# Altium PCB PCB1.PcbDoc
Units mm, origin at the board's own origin, x right, y up, seen from the top; angles counter-clockwise.
Board outline 117.02 x 67.61 mm, 4 copper layers (Top Layer, Mid1- GND, Mid2- POWER, Bottom Layer), stack 1.233 mm thick; 108 components, 43 nets, 256 pads, 256 vias.
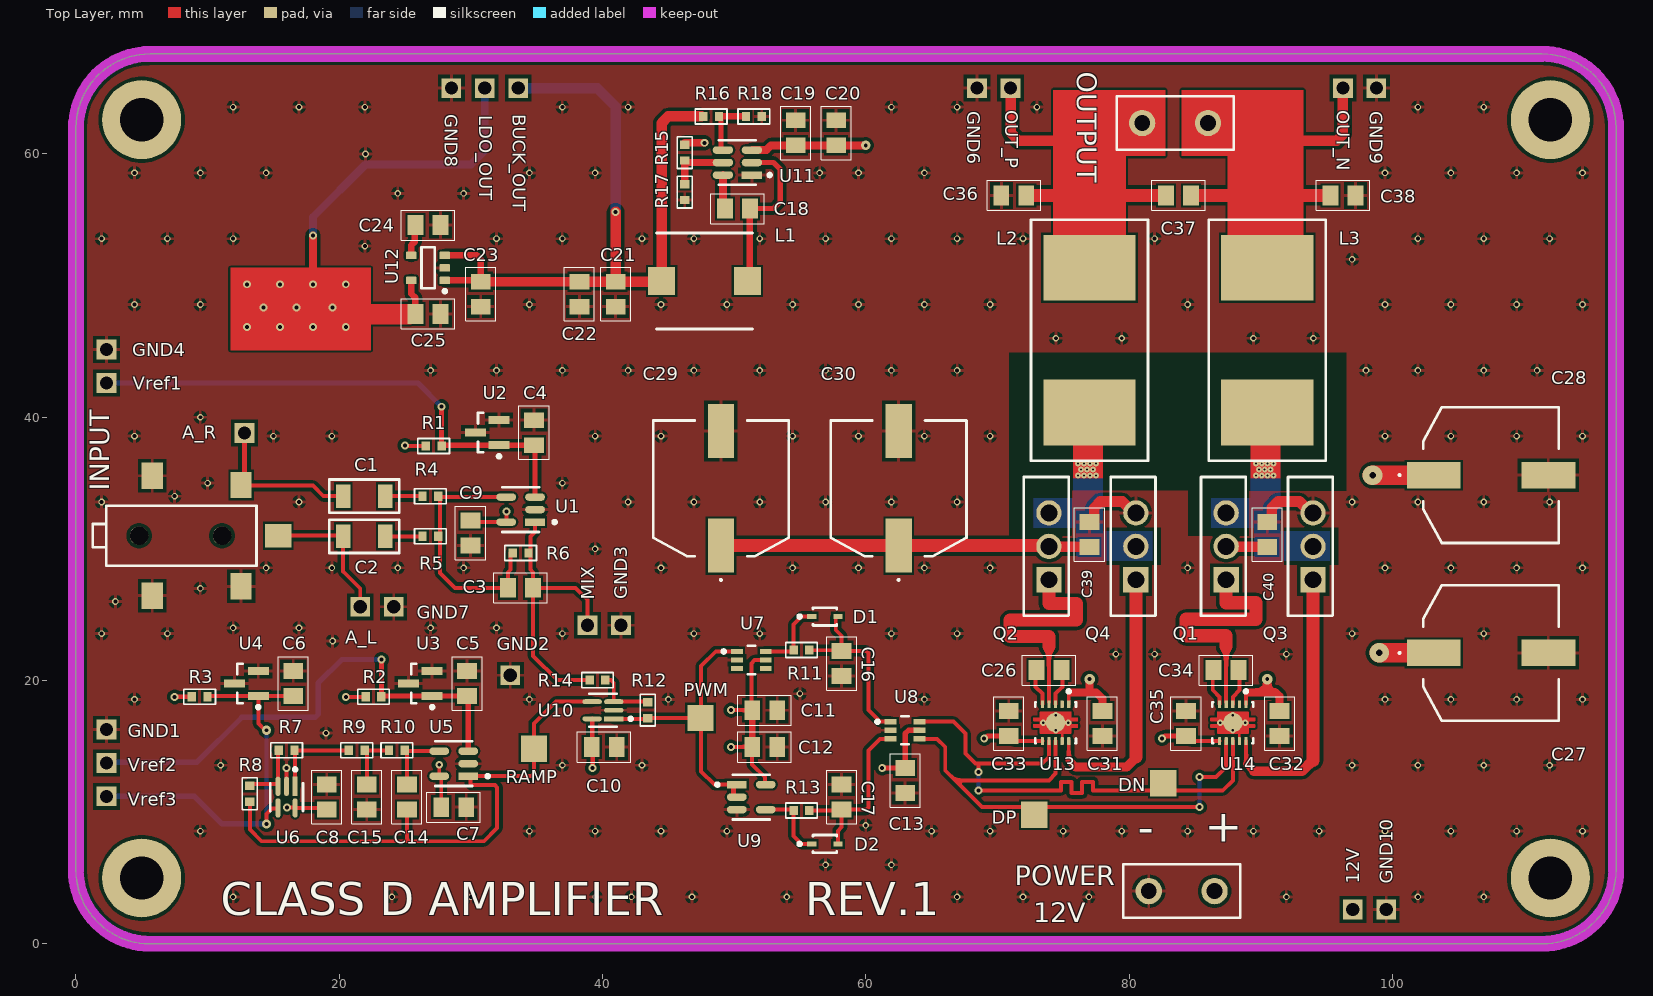
[diagram p0: Top Layer view]
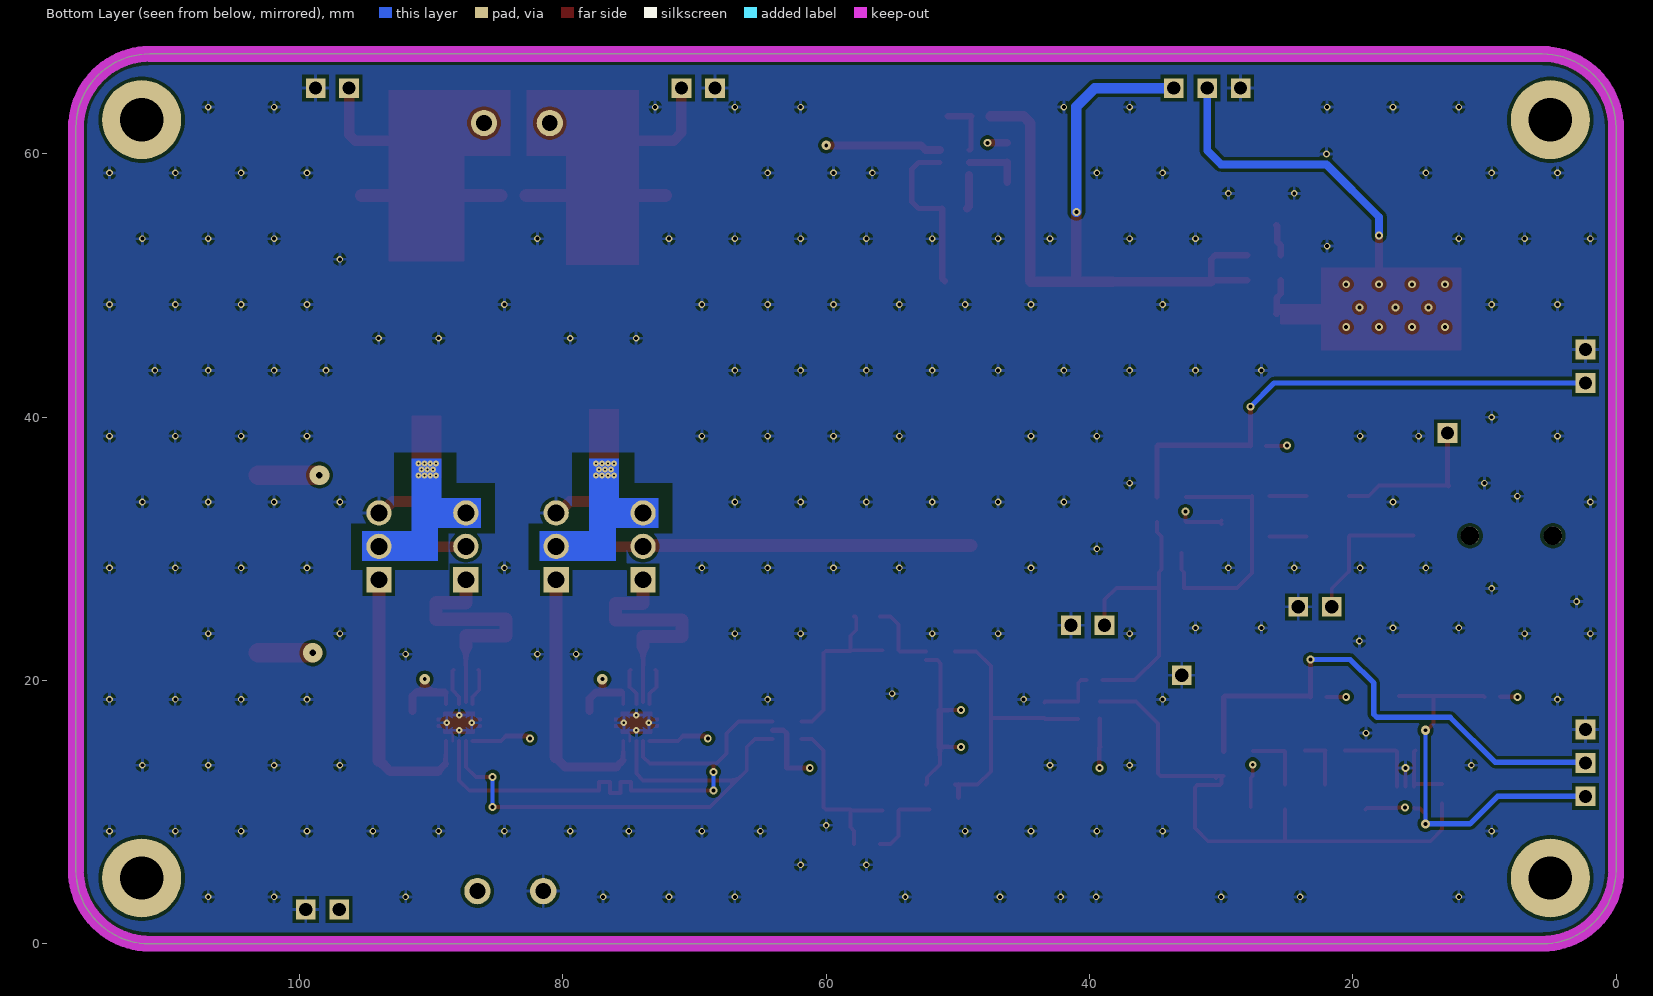
[diagram p1: Bottom Layer view, seen from below]
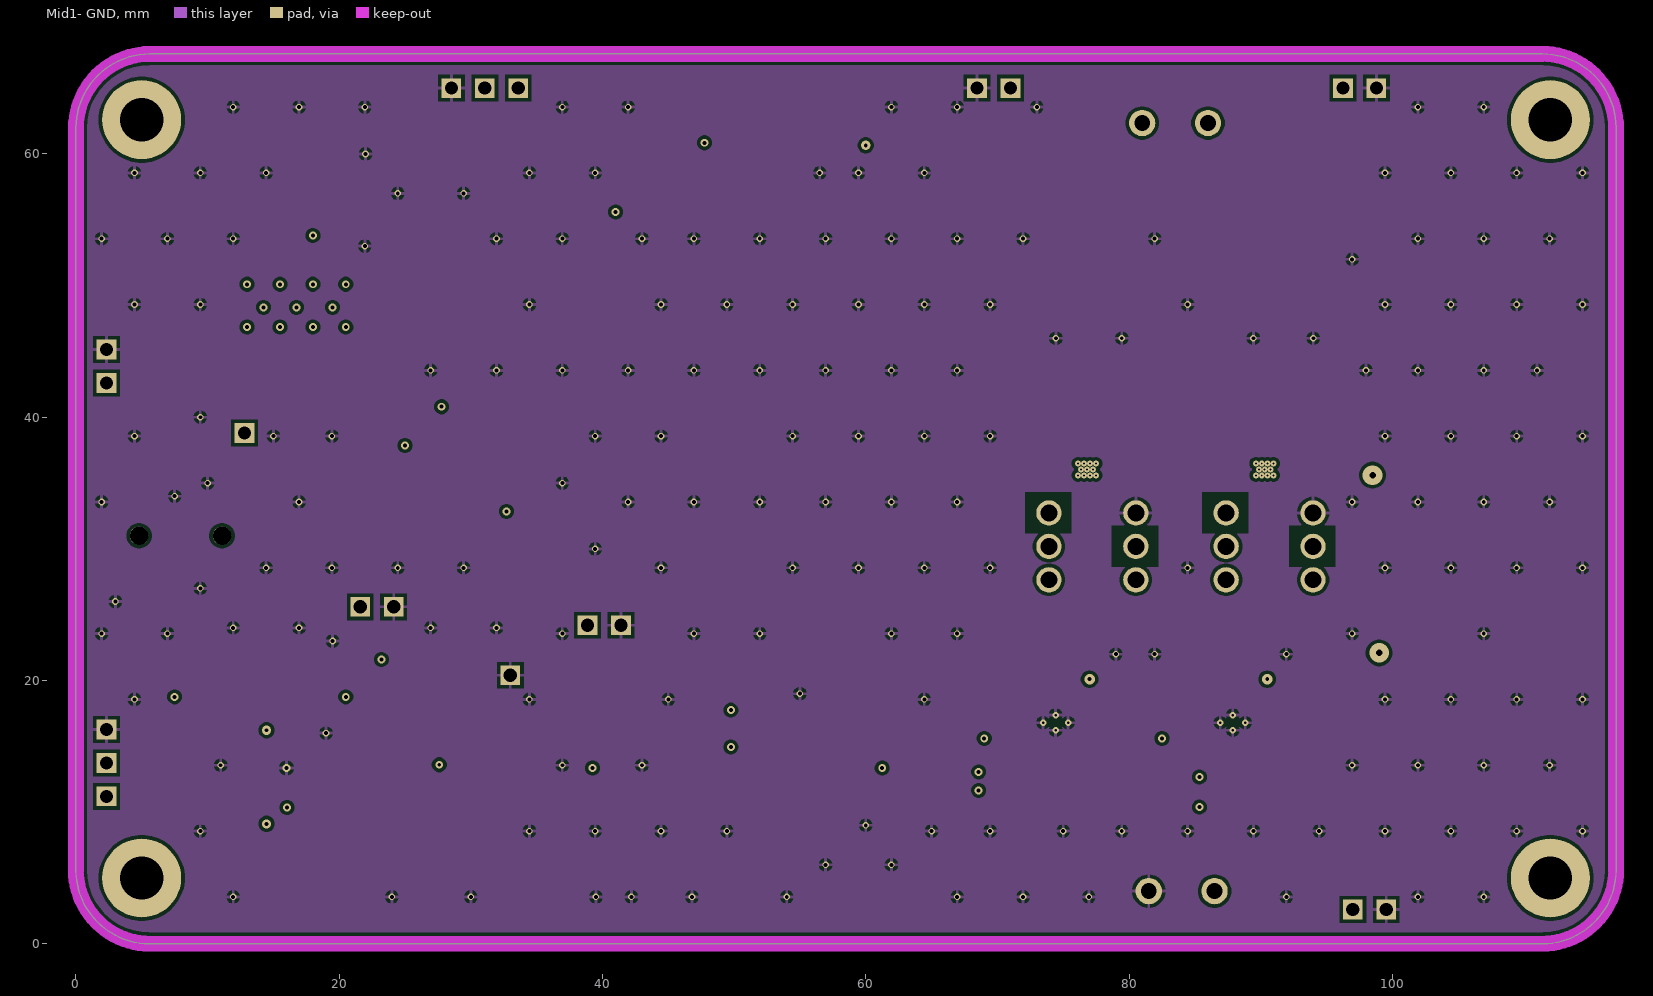
[diagram p2: Mid1- GND]
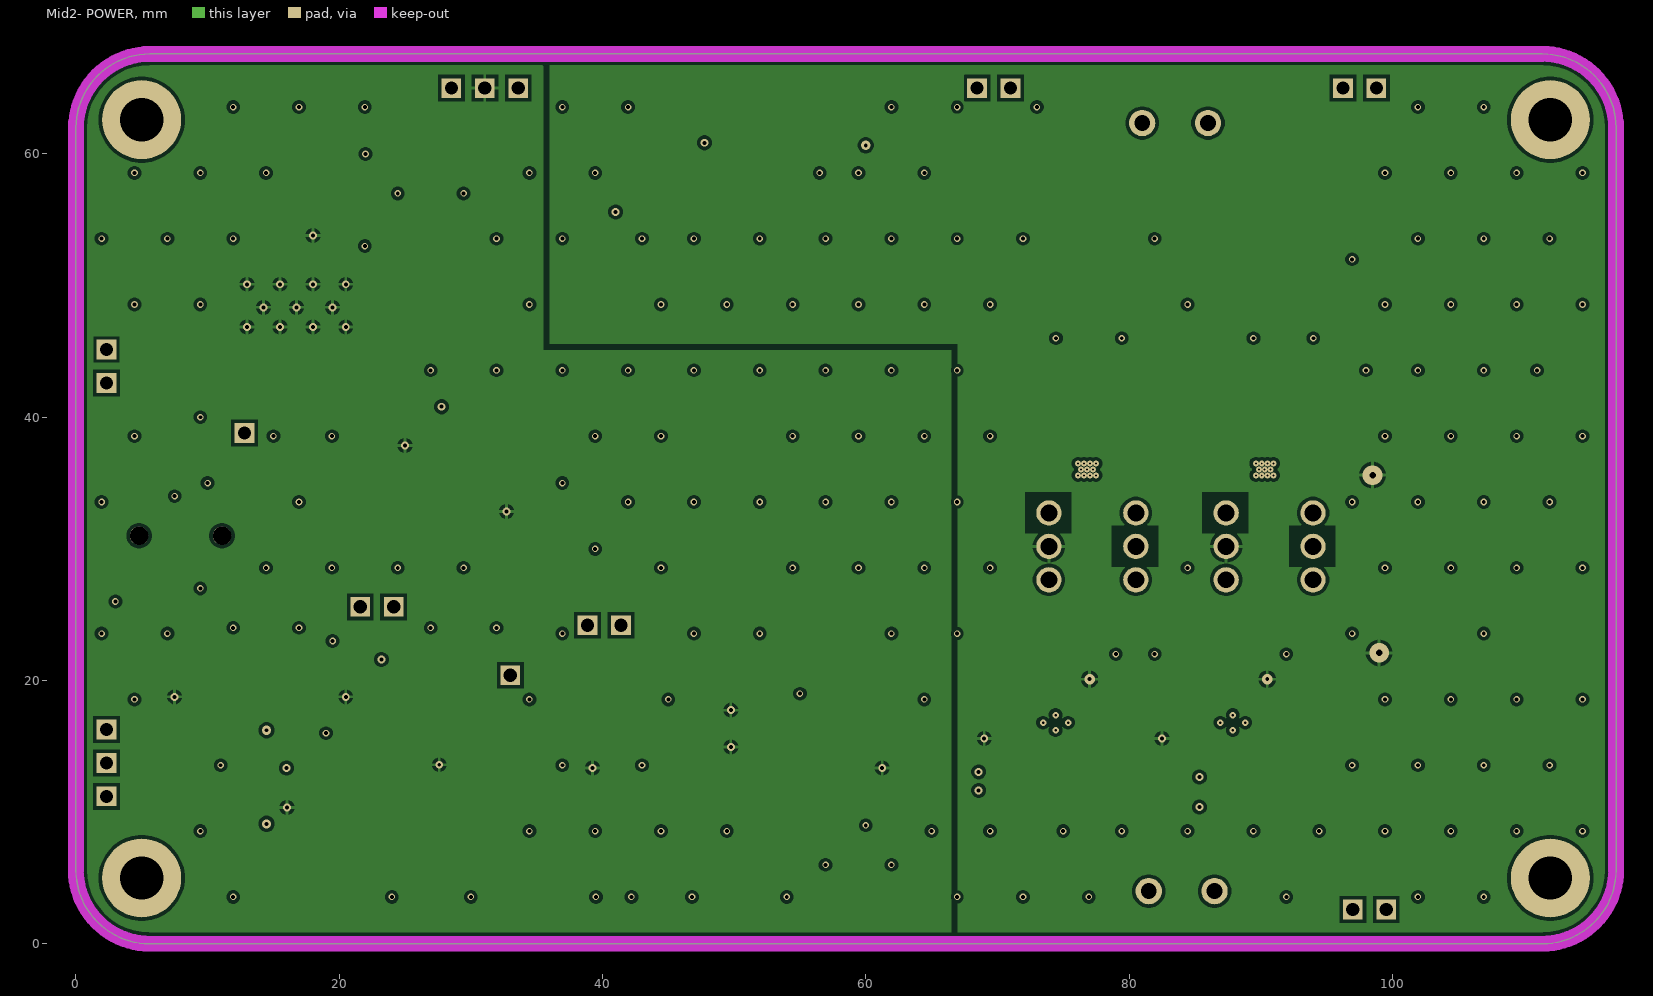
[diagram p3: Mid2- POWER]
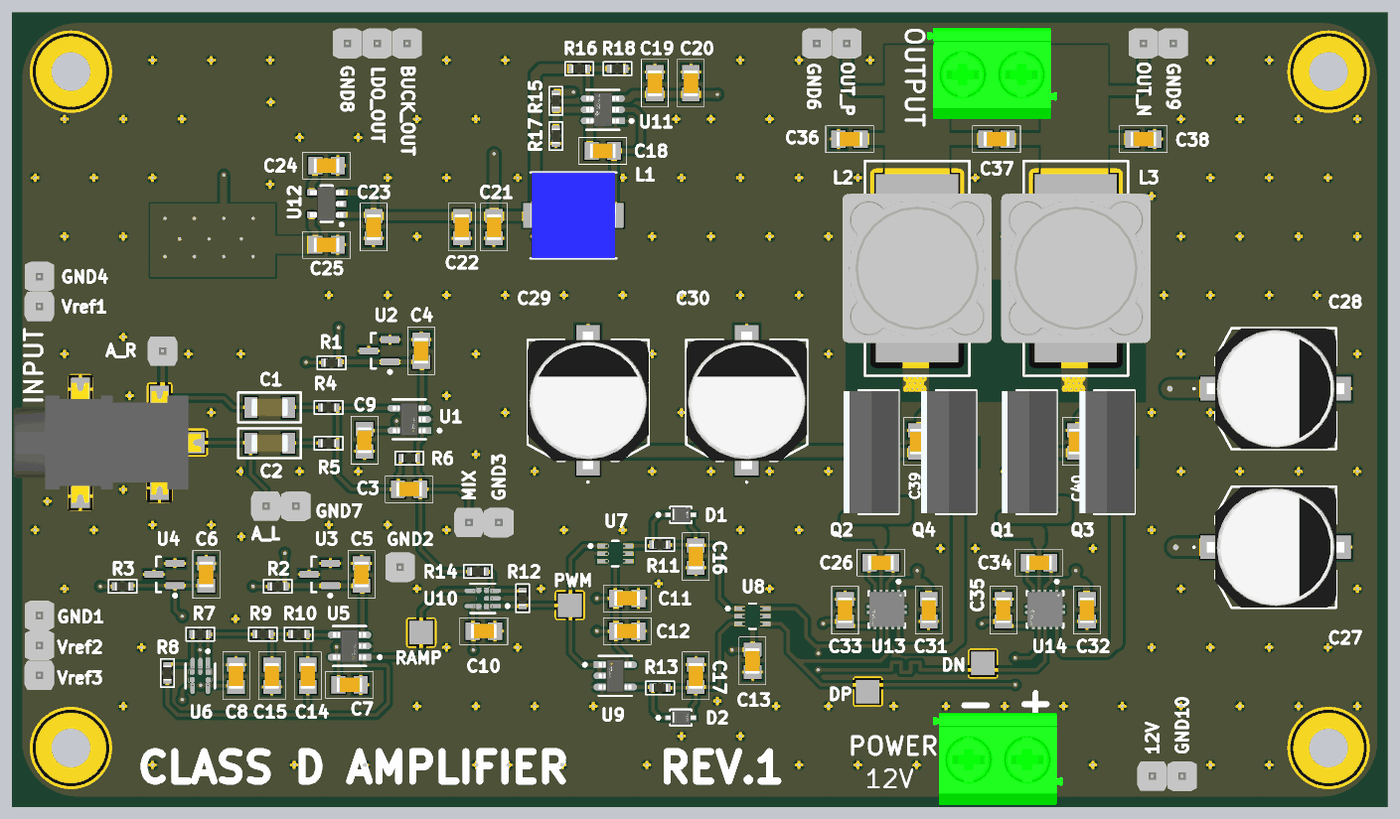
[diagram p4: 3D render of the assembled board from above, using the file's embedded part models]

## Layer stack, top to bottom
Top Solder: solder mask 0.0102, Solder Resist, Dk 3.5
Top Layer: signal copper 0.035
Dielectric 4: prepreg 0.2083, PP-022, Dk 4.5
Mid1- GND: signal copper 0.0175
Dielectric 1: core 0.7112, Core-039, Dk 4.8
Mid2- POWER: signal copper 0.0175
Dielectric 5: prepreg 0.2083, PP-022, Dk 4.5
Bottom Layer: signal copper 0.035
Bottom Solder: solder mask 0.0102, Solder Resist, Dk 3.5

## Board outline
5.6,0 cw(c5.621,5.631) -0.01,5.61 0,5.61 0.001,61.99 cw(c5.631,61.969) 5.61,67.599 111.39,67.6 111.39,67.61 cw(c111.369,61.979) 117,62 117,5.61 117.01,5.61 cw(c111.379,5.631) 111.4,0

## Design rules (kind name [scope] priority, off if disabled: settings)
Clearance [All] p1: gap=0.254 ignorepadtopadclearanceinfootprint=FALSE except(0.1: Arc-Arc Arc-Track Arc-SMDPad Track-Track Track-SMDPad; 0.15: SMDPad-SMDPad SMDPad-Fill SMDPad-Poly SMDPad-Region Fill-Fill Fill-Poly Fill-Region Poly-Poly Poly-Region Region-Region; 0.2: Arc-Via Arc-Hole Track-Via Track-Hole SMDPad-Via THPad-Via)
HoleSize [All] p1: absolutevalues=TRUE maxlimit=3.5 minlimit=0.025 maxpercent=80.000 minpercent=20.000
MatchedLengths MatchedLengths_GateDriver2 [InNetClass('GDriver2')] p1: tolerance=2 checknetsindiffpair=FALSE checkdiffpairvsdiffpair=TRUE checkxsignals=TRUE checkothers=TRUE
MatchedLengths MatchedLengths_GateDriver1 [InNetClass('GDriver1')] p2: tolerance=2 checknetsindiffpair=FALSE checkdiffpairvsdiffpair=TRUE checkxsignals=TRUE checkothers=TRUE
MatchedLengths MatchedLengths_DeadTimeSignals [InNetClass('DeadTimeSignals')] p3: tolerance=0.5 checknetsindiffpair=FALSE checkdiffpairvsdiffpair=TRUE checkxsignals=TRUE checkothers=TRUE
MatchedLengths MatchedLengths_Buff [InNetClass('buff')] p4: tolerance=0.5 checknetsindiffpair=FALSE checkdiffpairvsdiffpair=TRUE checkxsignals=TRUE checkothers=TRUE
MinimumSolderMaskSliver [All] p1: minsoldermaskwidth=0.1
PolygonConnect [All] p1: connectstyle=Relief reliefconductorwidth=0.254 reliefentries=4 polygonreliefangle="90 Angle" airgapwidth=0.254
RoutingVias [All] p1: holewidth=0.3 width=0.6 viastyle="Through Hole" minholewidth=0.2 minwidth=0.45 maxholewidth=0.5 maxwidth=1
SilkToSilkClearance [All] p1: silktosilkclearance=0.2
SilkToSolderMaskClearance [IsPad] p1: minsilkscreentomaskgap=0.15 clearancetoexposedcopper=TRUE
SolderMaskExpansion [All] p1: expansion=0.102 istentingtop=FALSE
SupplyNets "Schematic Supply Nets_2" [InNet('12V')] p1: voltage=0.000
SupplyNets "Schematic Supply Nets_1" [InNet('GND')] p2: voltage=0.000
SupplyNets "Schematic Supply Nets" [InNet('5V')] p3: voltage=0.000
Width [All] p1: maxlimit=3 minlimit=0.1 preferedwidth=0.3
26 further rules are at their usual default settings.

## Classes and differential pairs
component class U_power_section: 12V BUCK_OUT C18 C19 C20 C21 C22 C23 C24 C25 GND8 GND10 L1 LDO_OUT R15 R16 R17 R18 U11 U12
component class U_output_stage: C26 C27 C28 C29 C30 C31 C32 C33 C34 C35 C36 C37 C38 C39 C40 GND6 GND9 L2 L3 OUT_N OUT_P Q1 Q2 Q3 Q4 U13 U14
component class U_control_logic: C1 C2 C3 C4 C5 C6 C7 C8 C9 C10 C11 C12 C13 C14 C15 C16 C17 D1 D2 DN DP GND1 GND2 GND3 GND4 MIX PWM R1 R2 R3 R4 R5 R6 R7 R8 R9 R10 R11 R12 R13 R14 RAMP U1 U2 U3 U4 U5 U6 U7 U8 U9 U10 Vref1 Vref2 Vref3
component class U_top: A_L A_R GND7 INPUT OUTPUT POWER

## Components (designator, comment, footprint, x,y, rotation, side; value= is the part's Value field where it differs from the comment)
12V "TestPoint" TestPoint_THT 97,2.6 r0 top
A_L "TestPoint" TestPoint_THT 21.6,25.6 r0 top
A_R "TestPoint" TestPoint_THT 12.8,38.8 r0 top
BUCK_OUT "TestPoint" TestPoint_THT 33.6,65 r90 top
C1 "470n" CAP_1206 21.906,34.002 r0 top
C2 "470n" CAP_1206 21.906,30.954 r0 top
C3 "470p" CAP_IPC_0805_133A 33.782,27.042 r0 top
C4 "100n" CAP_IPC_0805_133A 34.798,38.828 r90 top
C5 "100n" CAP_IPC_0805_133A 29.718,19.778 r90 top
C6 "100n" CAP_IPC_0805_133A 16.51,19.778 r90 top
C7 "100n" CAP_IPC_0805_133A 28.702,10.38 r0 top
C8 "100n" CAP_IPC_0805_133A 19.05,11.142 r90 top
C9 "100n" CAP_IPC_0805_133A 29.972,31.208 r270 top
C10 "100n" CAP_IPC_0805_133A 40.132,14.952 r0 top
C11 "100n" CAP_IPC_0805_133A 52.324,17.746 r0 top
C12 "100n" CAP_IPC_0805_133A 52.324,14.952 r0 top
C13 "100n" CAP_IPC_0805_133A 62.992,12.412 r270 top
C14 "1n" CAP_IPC_0805_133A 25.146,11.142 r270 top
C15 "180p" CAP_IPC_0805_133A 22.098,11.142 r270 top
C16 "100p" CAP_IPC_0805_133A 58.166,21.302 r270 top
C17 "100p" CAP_IPC_0805_133A 58.166,11.142 r90 top
C18 "100n" CAP_IPC_0805_133A 50.25,55.85 r0 top
C19 "10u" CAP_IPC_0805_133A 54.676,61.606 r90 top
C20 "100n" CAP_IPC_0805_133A 57.75,61.606 r90 top
C21 "22u" CAP_IPC_0805_133A 41,49.35 r270 top
C22 "22u" CAP_IPC_0805_133A 38.25,49.35 r270 top
C23 "4.7u" CAP_IPC_0805_133A 30.75,49.35 r270 top
C24 "10n" CAP_IPC_0805_133A 26.75,54.6 r0 top
C25 "2.2u" CAP_IPC_0805_133A 26.75,47.85 r0 top
C26 "100n" CAP_IPC_0805_133A 73.914,20.794 r180 top
C27 "470u" EEEFK1V331P 107.5,22.1 r270 top
C28 "EEEFK1E471P" EEEFK1V331P 107.5,35.6 r270 top value=470u
C29 "EEEFK1E471P" EEEFK1V331P 49,34.6 r0 top value=470u
C30 "EEEFK1E471P" EEEFK1V331P 62.5,34.6 r0 top value=470u
C31 "4.7u" CAP_IPC_0805_133A 77.978,16.73 r270 top
C32 "4.7u" CAP_IPC_0805_133A 91.44,16.73 r270 top
C33 "1n" CAP_IPC_0805_133A 70.866,16.73 r270 top
C34 "100n" CAP_IPC_0805_133A 87.376,20.794 r180 top
C35 "1n" CAP_IPC_0805_133A 84.328,16.73 r270 top
C36 "180n" CAP_IPC_0805_133A 71.25,56.85 r180 top
C37 "1u" CAP_IPC_0805_133A 83.75,56.85 r0 top
C38 "180n" CAP_IPC_0805_133A 96.25,56.85 r180 top
C39 "100n" CAP_IPC_0805_133A 77,31.1 r90 top
C40 "100n" CAP_IPC_0805_133A 90.5,31.1 r90 top
D1 "1N4148WSF-7" 1N4148 56.896,24.858 r0 top value=1.5pF
D2 "1N4148WSF-7" 1N4148 56.896,7.586 r0 top value=1.5pF
DN "TestPoint" TestPoint_SMT 82.6,12.2 r0 top
DP "TestPoint" TestPoint_SMT 72.8,9.8 r0 top
GND1 "TestPoint" TestPoint_THT 2.314,16.28 r90 top
GND2 "TestPoint" TestPoint_THT 33,20.4 r90 top
GND3 "TestPoint" TestPoint_THT 41.4,24.2 r90 top
GND4 "TestPoint" TestPoint_THT 2.314,45.14 r90 top
GND6 "TestPoint" TestPoint_THT 68.46,65 r90 top
GND7 "TestPoint" TestPoint_THT 24.14,25.6 r90 top
GND8 "TestPoint" TestPoint_THT 28.52,65 r90 top
GND9 "TestPoint" TestPoint_THT 98.79,65 r90 top
GND10 "TestPoint" TestPoint_THT 99.54,2.6 r90 top
INPUT "mini_jack_3ch" 150303_mini_jack3.5mm 2.8,31 r90 top
L1 "46153C" INDPM7373X455N 47.75,50.35 r180 top value=15u
L2 "22u" SRR1208-220ML 77,45.85 r90 top
L3 "22u" SRR1208-220ML 90.5,45.85 r90 top
LDO_OUT "TestPoint" TestPoint_THT 31.06,65 r90 top
MIX "TestPoint" TestPoint_THT 38.86,24.2 r0 top
OUT_N "TestPoint" TestPoint_THT 96.25,65 r90 top
OUT_P "TestPoint" TestPoint_THT 71,65 r90 top
OUTPUT "Connector_1x2" TerminalBlock_1x2 83.5,62.35 r180 top
POWER "Connector_1x2" TerminalBlock_1x2 84,4 r180 top
PWM "TestPoint" TestPoint_SMT 47.45,17.146 r0 top
Q1 "IRFZ24NPBF" IRFZ24NPBF 87.376,27.652 r90 top
Q2 "IRFZ24NPBF" IRFZ24NPBF 73.914,27.652 r90 top
Q3 "IRFZ24NPBF" IRFZ24NPBF 93.98,27.652 r90 top
Q4 "IRFZ24NPBF" IRFZ24NPBF 80.518,27.652 r90 top
R1 "2.4k" RES_VJ_0402_MD 27.178,37.812 r0 top
R2 "2.4k" RES_VJ_0402_MD 22.606,18.762 r0 top
R3 "2.4k" RES_VJ_0402_MD 9.398,18.762 r0 top
R4 "22k" RES_VJ_0402_MD 26.924,34.002 r0 top
R5 "22k" RES_VJ_0402_MD 26.924,30.954 r0 top
R6 "10k" RES_VJ_0402_MD 33.782,29.684 r0 top
R7 "25k" RES_VJ_0402_MD 16.002,14.698 r0 top
R8 "10k" RES_VJ_0402_MD 13.208,11.396 r90 top
R9 "500" RES_VJ_0402_MD 21.336,14.698 r0 top
R10 "500" RES_VJ_0402_MD 24.384,14.698 r0 top
R11 "200" RES_VJ_0402_MD 55.118,22.318 r0 top
R12 "330k" RES_VJ_0402_MD 43.434,17.746 r270 top
R13 "200" RES_VJ_0402_MD 55.118,10.126 r0 top
R14 "1k" RES_VJ_0402_MD 39.624,20.032 r0 top
R15 "536k" RES_VJ_0402_MD 46.25,60.1 r270 top
R16 "100k" RES_VJ_0402_MD 48.25,62.85 r0 top
R17 "71.5k" RES_VJ_0402_MD 46.25,57.1 r270 top
R18 "11k" RES_VJ_0402_MD 51.5,62.85 r0 top
RAMP "TestPoint" TestPoint_SMT 34.798,14.825 r90 top
U1 "TLV9061IDBVR" TLV9061 33.782,32.986 r180 top
U2 "LM4040C25IDBZTG4" LM4040C25 31.242,38.828 r180 top
U3 "LM4040C25IDBZTG4" LM4040C25 26.162,19.778 r180 top
U4 "LM4040C25IDBZTG4" LM4040C25 12.954,19.778 r180 top
U5 "TLV9061IDBVR" TLV9061 28.702,13.682 r180 top
U6 "TLV3201AIDCKR" TLV3201 16.002,11.142 r270 top
U7 "SN74LVC2G17DCKR" SN74LVC2G17DCKR 51.308,21.556 r0 top
U8 "SN74LVC2G17DCKR" SN74LVC2G17DCKR 62.992,16.222 r0 top
U9 "SN74AHC1G00DBVR" SN74AHC1G00DBVR 51.308,11.142 r0 top
U10 "TLV3201AIDCKR" TLV3201 40.038,17.739 r180 top
U11 "TPS54202HDDCR" TPS54202HDDCR 50.25,59.35 r180 top
U12 "LP2985-50DBVRG4" LP2985-50DBVRG4 26.75,51.35 r180 top
U13 "UCC27282DRCT" UCC27282 74.422,16.797 r270 top
U14 "UCC27282DRCT" UCC27282 87.884,16.797 r270 top
Vref1 "TestPoint" TestPoint_THT 2.314,42.6 r0 top
Vref2 "TestPoint" TestPoint_THT 2.314,13.74 r270 top
Vref3 "TestPoint" TestPoint_THT 2.314,11.2 r0 top

## Footprints (in the part's own frame and the unit in brackets; to place one, negate y for a bottom-side part, rotate by r counter-clockwise, add the part's x,y. Pads: shape width x height; smd on the part's side, far side on the other; paste and mask are expansions set on the pad)
1N4148 [mm]
  rect 0.71x0.403 smd paste+0 mask+0: 1(-0.995,0) 2(0.995,0)
  silkscreen extent -2.05,-0.67 0.9,0.67, body extent -1.45,-0.77 1.45,0.77, height 0.25
150303_mini_jack3.5mm [mm]
  rect 2x1.6 smd mask+0.3: 1(-3.85,-9.75) 3(3.85,-9.75) 4(-4.55,-3) 4(4.55,-3)
  rect 1.8x2 smd mask+0.3: 2(0,-12.573)
  round 1.4 hole 1.4 mask+0: 6(0,-2) 7(0,-8.3)
  silkscreen extent -2.29,-10.92 2.29,1.52, body extent -5.1,-13.3 5.1,2.7, height 6
CAP_1206 [mm]
  rect 1.1x1.8 smd: 1(-1.6,0) 2(1.6,0)
  silkscreen extent -2.67,-1.27 2.67,1.27, body extent -1.6,-0.8 1.6,0.8, height 1.8
CAP_IPC_0805_133A [mm]
  rect 1.2x1.5 smd: 1(-0.95,0) 2(0.95,0)
  silkscreen extent -2.03,-1.14 2.03,1.14, body extent -1.1,-0.63 1.1,0.63, height 1.33
EEEFK1V331P [mm]
  rect 2x4.1 smd: 1(0,-4.35) 2(0,4.35)
  silkscreen extent -5.15,-7 5.15,5.15, body extent -5.15,-5.85 5.15,5.85, height 10.2
INDPM7373X455N [mm]
  rect 2.05x2.1 smd: 1(-3.25,0) 2(3.25,0)
  silkscreen extent -3.65,-3.65 3.65,3.65, body extent -3.65,-3.65 3.65,3.65, height 4.55
IRFZ24NPBF [mm]
  rect 1.92x1.92 / inner round 1.92 / far side rect 1.92x1.92 hole 1.28: 1(0,0)
  round 1.92 hole 1.28: 2(2.54,0) 3(5.08,0)
  silkscreen extent -2.73,-1.5 7.81,1.91, body extent -2.67,-1.52 7.75,3.18, height 18.84
LM4040C25 [mm] "SOT23, 3-Leads, Body 2.92x1.3 mm, Pitch 0.95 mm, IPC Medium Density"
  rect 1.6x0.6 smd: 1(-0.9,0.95) 2(-0.9,-0.95) 3(0.9,0)
  silkscreen extent -1.03,-1.5 0.7,1.92, body extent -0.7,-1.52 0.7,1.52, height 1.12
LP2985-50DBVRG4 [mm] "SOT23, 5-Leads, Body 3.05x1.75mm, Pitch 0.95mm, IPC High Density"
  rrect18% 0.8x0.55 smd: 1(-1.275,0.95) 2(-1.275,0) 3(-1.275,-0.95) 4(1.275,-0.95) 5(1.275,0.95)
  silkscreen extent -1.4,-1.55 0.5,1.9, body extent -1.42,-1.46 1.42,1.46, height 1.08
RES_VJ_0402_MD [mm] "Chip Resistor, 2-Leads, Body 1,07x0,56mm, IPC Medium Density"
  rect 0.635x0.7 smd: 1(-0.6,0) 2(0.6,0)
  silkscreen extent -1.21,-0.57 1.21,0.57, body extent -0.64,-0.35 0.64,0.35, height 0.84
SN74AHC1G00DBVR [mm]
  rect 1.505x0.572 smd paste+0 mask+0: 1(-1.1,0.95)
  rrect100% 1.505x0.572 smd paste+0 mask+0: 2(-1.1,0) 3(-1.1,-0.95) 4(1.1,-0.95) 5(1.1,0.95)
  silkscreen extent -2.7,-1.7 1.4,1.7, body extent -2.1,-1.7 2.1,1.7, height 0.25
SN74LVC2G17DCKR [mm]
  rect 0.9x0.4 smd paste-1000 mask+0: 1(-1.1,0.65) 2(-1.1,0) 3(-1.1,-0.65) 4(1.1,-0.65) 5(1.1,0) 6(1.1,0.65)
  silkscreen extent -2.22,-1.07 0.27,1.07, body extent -1.65,-1.33 1.65,1.33, height 0.25
SRR1208-220ML [mm]
  rect 5x7 smd mask+0.5: 1(-5.5,0) 2(5.5,0)
  silkscreen extent -9.14,-4.45 9.14,4.45, body extent -6.35,-6.35 6.35,6.35, height 8.55
TerminalBlock_1x2 [mm]
  round 2 hole 1.2 mask+0.3: 1(-2.5,0) 2(2.5,0)
  silkscreen extent -4.44,-2.03 4.44,2.03, body extent -5.4,-4 5.66,3.8, height 10.25
TestPoint_SMT [mm]
  rect 2x2 smd mask+0.3: 1(0,0)
TestPoint_THT [mm]
  rect 1.5x1.5 hole 1 mask+0.2: 1(0,0)
  body extent -1.27,-1.25 1.27,1.25, height 9.25
TLV3201 [mm]
  rect 1.464x0.376 smd paste+0 mask+0: 1(-0.82,0.65)
  rrect100% 1.464x0.376 smd paste+0 mask+0: 2(-0.82,0) 3(-0.82,-0.65) 4(0.82,-0.65) 5(0.82,0.65)
  silkscreen extent -2.23,-1.25 1.05,1.25, body extent -1.8,-1.25 1.8,1.25, height 0.25
TLV9061 [mm]
  rect 1.505x0.572 smd paste+0 mask+0: 1(-1.1,0.95)
  rrect100% 1.505x0.572 smd paste+0 mask+0: 2(-1.1,0) 3(-1.1,-0.95) 4(1.1,-0.95) 5(1.1,0.95)
  silkscreen extent -2.7,-1.7 1.4,1.7, body extent -2.1,-1.7 2.1,1.7, height 0.25
TPS54202HDDCR [mm]
  rect 1.554x0.572 smd paste+0 mask+0: 1(-1.1,0.95)
  rrect100% 1.554x0.572 smd paste+0 mask+0: 2(-1.1,0) 3(-1.1,-0.95) 4(1.1,-0.95) 5(1.1,0) 6(1.1,0.95)
  silkscreen extent -2.58,-1.7 1.4,1.7, body extent -2.13,-1.7 2.13,1.7, height 0.25
UCC27282 [mm]
  rrect42% 0.6x0.24 smd paste+0 mask+0: 1(-1.4,1) 2(-1.4,0.5) 3(-1.4,0) 4(-1.4,-0.5) 5(-1.4,-1) 6(1.4,-1) 7(1.4,-0.5) 8(1.4,0) 9(1.4,0.5) 10(1.4,1)
  round 1.485 smd paste-1000 mask+0: 11(0,0)
  Top Layer region: -0.825,-1.15 -0.818,-1.175 -0.8,-1.193 -0.775,-1.2 -0.775,-1.2 -0.375,-1.2 -0.375,-1.65 -0.368,-1.675 -0.35,-1.693 -0.325,-1.7 -0.325,-1.7 -0.175,-1.7 -0.156,-1.696 -0.14,-1.685 -0.129,-1.669 -0.125,-1.65 -0.125,-1.65 -0.125,-1.2 0.125,-1.2 0.125,-1.65 0.129,-1.669 0.14,-1.685 0.156,-1.696 0.175,-1.7 0.175,-1.7 0.325,-1.7 0.35,-1.693 0.368,-1.675 0.375,-1.65 0.375,-1.65 0.375,-1.2 0.775,-1.2 0.8,-1.193 0.818,-1.175 0.825,-1.15 0.825,-1.15 0.825,1.15 0.818,1.175 0.8,1.193 0.775,1.2 0.775,1.2 0.375,1.2 0.375,1.65 0.368,1.675 0.35,1.693 0.325,1.7 0.325,1.7 0.175,1.7 0.156,1.696 0.14,1.685 0.129,1.669 0.125,1.65 0.125,1.65 0.125,1.2 -0.125,1.2 -0.125,1.65 -0.129,1.669 -0.14,1.685 -0.156,1.696 -0.175,1.7 -0.175,1.7 -0.325,1.7 -0.35,1.693 -0.368,1.675 -0.375,1.65 -0.375,1.65 -0.375,1.2 -0.775,1.2 -0.8,1.193 -0.818,1.175 -0.825,1.15 -0.825,1.15
  silkscreen extent -2.5,-1.55 1.55,1.55, body extent -1.8,-1.8 1.8,1.8, height 0.25

## Part data
12V A_L A_R BUCK_OUT DN DP GND1 GND2 GND3 GND4 GND6 GND7 GND8 GND9 GND10 LDO_OUT MIX OUT_N OUT_P PWM RAMP Vref1 Vref2 Vref3: "Test Point"
C1 C2 C31 C32 C39 C40: library part Capacitor
C3: library part Capacitor, Dielectric=C0G, Voltage=10
C4 C5 C6 C7 C8 C9 C10 C11 C12 C13: library part Capacitor, Dielectric=X7R, Voltage=16
C14 C15 C16 C17: library part Capacitor, Dielectric=C0G
  C14 C15: Volatge=16
  C16 C17: Volatge=10
C18 C19 C20 C21 C22 C24 C25 C26 C33 C34 C35: library part Capacitor, Dielectric=X7R
  C18 C21 C22 C24 C25: Volatge=16
  C19 C20 C33 C35: Volatge=25
  C26 C34: Volatge=50
C23: library part Capacitor, Dielectric=X7R, Voltage=16V
C27: library part EEEFK1E471P, "Capacitor Polarised", Manufacturer_Name=Panasonic, Mouser Part Number=667-EEE-FK1E471P, Arrow Part Number=EEEFK1E471P, Arrow Price/Stock=https://www.arrow.com/en/products/eee-fk1e471p/panasonic, Datasheet Link=http://industrial.panasonic.com/cdbs/www-data/pdf/RDE0000/ABA0000C1181.pdf, Manufacturer_Part_Number=EEEFK1E471P, Mouser Price/Stock=http://www.mouser.com/Search/ProductDetail.aspx?qs=qE6bgDGEOCvvsolWS4cebg%3d%3d
C28 C29 C30: "Capacitor Polarised", Manufacturer_Name=Panasonic, Mouser Part Number=667-EEE-FK1E471P, Arrow Part Number=EEEFK1E471P, Arrow Price/Stock=https://www.arrow.com/en/products/eee-fk1e471p/panasonic, Datasheet Link=http://industrial.panasonic.com/cdbs/www-data/pdf/RDE0000/ABA0000C1181.pdf, Manufacturer_Part_Number=EEEFK1E471P, Mouser Price/Stock=http://www.mouser.com/Search/ProductDetail.aspx?qs=qE6bgDGEOCvvsolWS4cebg%3d%3d
C36 C37 C38: library part Capacitor, Dielectric=X7R, Voltage=50
D1 D2: library part 1N4148, "DIODE GEN PURP 100V 250MA SOD323", Capacitance=1.5pF, Forward Current=250mA, Manufacturer="Diodes Inc.", Max Junction Temp=+150°C, Max Repetitive Reverse Voltage=100V, Max Surge Forward Current=0.5A, Package=SOD323F, Peak Reverse Current=0.5uA, Temperature="-55°C to +150°C", Temperature Range Low=-55°C, Automotive=No, Category=Diode, ComponentLink2Description=Datasheet, ComponentLink2URL=https://www.diodes.com/assets/Datasheets/1N4148WSF.pdf, Device Class L1="Discrete Semiconductors", Device Class L2=Diodes, Device Class L3="Rectifier Diodes", Digikey Description="DIODE GEN PURP 100V 250MA SOD323", Footprint Url=https://www.diodes.com/assets/Package-Files/SOD323F.pdf, Height=0.75mm, Lead Free=Yes, Manufacturer Part Number=1N4148WSF-7, Mouser Description="Diodes - General Purpose, Power, Switching 200mW 2pF 75Vrrm 150mA 2A 1VF", Octopart=https://octopart.com/1n4148wsf-7-diodes+inc.-33798544, Reverse Voltage=100V, RoHS=TRUE, Temperature Range High=+150°C
INPUT: "Connector: Jack 3.5mm; socket; female; stereo; tracks: 3", Part Number="1503 03", ComponentLink1Description=TME, ComponentLink1URL=https://www.tme.eu/pl/details/1503-03/zlacza-jack/lumberg/1503-03/, Producer=LUMBERG
L1: library part 46153C_inductor, "Fixed Inductors 15uH 2.2A SMT", Manufacturer_Name="Murata Electronics", Datasheet Link=https://search.murata.co.jp/Ceramy/image/img/P02A/kmp_4600.pdf, Geometry.Height=4.55mm, Manufacturer_Part_Number=46153C
L2 L3: library part SRR1208-220ML_inductor, "Inductor SMD; 22uH; Ioperation: 3.5A; R: 43mΩ; ±20%; Isat: 4A", Manufacturer_Name=BOURNS, Manufacturer_Part_Number=SRR1208-220ML
OUTPUT POWER: "Fixed Terminal Blocks Terminal block, screw type, 1x2", ComponentLink1Description="TME site", ComponentLink1URL=https://www.tme.eu/pl/details/dg126-5.0-2p14/listwy-zaciskowe-do-druku/degson-electronics/dg126-5-0-02p-14-00z-h/
Q1 Q2 Q3 Q4: "HEXFET POWER MOSFET N-CHANNEL", Manufacturer_Name=Infineon, Geometry.Height=4.69mm, Manufacturer_Part_Number=IRFZ24NPBF
R1 R2 R3 R4 R5 R6 R7 R8 R9 R10 R11 R12 R13 R14 R15 R16 R17 R18: library part Resistor, ComponentLink1Description=HelpURL
U1 U5: library part TLV9061, "IC CMOS 1 CIRCUIT SOT23-5", Case/Package=SOT-23-6, Input Bias Current=0.5pA, Input Offset Voltage (Vos)=300uV, Max Operating Temperature=125°C, Min Operating Temperature=-40°C, Operating Supply Current=538uA, Output Current per Channel=50mA, Gain Bandwidth Product=10MHz, Mount="Surface Mount", Number of Circuits=1, Packaging="Cut Tape", RoHS Compliant=Yes, Slew Rate=6.5V/µs
U2 U3 U4: library part LM4040C25, "Precision Micropower Shunt Voltage Reference, 0.5% accuracy, 2.5 V, 15 ppm / degC, 15 mA, -40 to 85 degC, 3-pin SOT-23 (DBZ), Green (RoHS & no Sb/Br)", Manufacturer="Texas Instruments", Rating=Catalog, Temp Coeff(Max)(ppm/ degree C)=100, Temp Coeff(Typ)(ppm/ degree C)=15, Code_JEDEC=TO-236, ComponentLink1Description="Manufacturer URL", ComponentLink1URL=http://www.ti.com/, ComponentLink2Description=Datasheet, ComponentLink2URL=http://www.ti.com/general/docs/lit/getliterature.tsp?genericPartNumber=LM4040C25&fileType=pdf, ComponentLink3Description="Package Specification", ComponentLink3URL=http://www.ti.com/litv/pdf/mpds108a, DatasheetVersion=SLOS456K, Eco-Plan="Green (RoHS & no Sb/Br)", Initial Accuracy @ 25/deg C(%)=0.5, Iout/Iz(Max)(mA)=15, Min Iz for Regulation(uA)=75, Mounting Technology="Surface Mount", PackageDescription="3-Pin Plastic Small Outline, Body 2.92 x 1.3 mm, Pitch 0.95 mm", PackageReference=DBZ3, PackageVersion=4203227/B, PartNumber=LM4040C25IDBZTG4, SubFamily="Shunt Voltage Reference", VO(V)=2.5
U6 U10: library part TLV3201, "IC COMPARATOR RRI SGL SC70-5", Case/Package=SOT-23-5, Input Bias Current=5nA, Input Offset Voltage (Vos)=5mV, Max Operating Temperature=125°C, Max Supply Current=40uA, Max Supply Voltage=5.5V, Min Operating Temperature=-40°C, Min Supply Voltage=2.7V, Nominal Supply Current=50uA, Package Quantity=3000, Power Supply Rejection Ratio (PSRR)=85dB, Common Mode Rejection Ratio=85dB, Hysteresis=1.2mV, Lead Free="Lead Free", Max Input Current=5nA, Mount="Surface Mount", Number of Channels=1, Number of Elements=1, Number of Pins=5, Output Type=PUSH-PULL, Packaging="Tape and Reel", Propagation Delay=50ns, Quiescent Current=40uA, Radiation Hardening=No, Response Time=0.047us, RoHS Compliant=Yes, Series=-, Supply Current=50uA, Type="General Purpose"
U7 U8: "IC BUF NON-INVERT 5.5V SC70-6", Case/Package=SC, High Level Output Current=-32mA, Low Level Output Current=32mA, Max Operating Temperature=125°C, Max Supply Voltage=5.5V, Min Operating Temperature=-40°C, Min Supply Voltage=1.65V, Nominal Supply Current=250mA, Package Quantity=1, Quiescent Current=10uA, Contact Plating=Gold, Height=0.9mm, Lead Free="Lead Free", Length=2mm, Logic Function="Schmitt Trigger", Mount="Surface Mount", Number of Bits=2, Number of Bits per Element=1, Number of Channels=2, Number of Circuits=2, Number of Elements=2, Number of Gates=2, Number of Input Lines=2, Number of Inputs=2, Number of Output Lines=2, Number of Outputs=2, Number of Pins=6, Packaging="Tape and Reel", Polarity=Non-Inverting, Propagation Delay=4.3ns, Radiation Hardening=No, REACH SVHC="No SVHC", RoHS Compliant=Yes, Schmitt Trigger Input=Yes, Termination=SMD/SMT, Turn-On Delay Time=9.3ns, Width=1.25mm
U9: "IC GATE NAND 1CH 2-INP SOT23-5", Ambient Temperature Range High=+125°C, Ambient Temperature Range Low=-40°C, Manufacturer="Texas Instruments", Max Junction Temp=+150°C, Max Supply Voltage=5.5V, Min Supply Voltage=2V, Nominal Supply Current=1uA, Package=DBV0005A, Temperature="-40°C to +125°C", Automotive=No, Category=IC, ComponentLink2Description=Datasheet, ComponentLink2URL=https://www.ti.com/lit/ds/symlink/sn74ahc1g00.pdf, Device Class L1="Integrated Circuits (ICs)", Device Class L2="Logic ICs", Device Class L3="Logic Gates", Digikey Description="IC GATE NAND 1CH 2-INP SOT23-5", Height=1.45mm, Lead Free=Yes, Logic Function Desc=NAND, Manufacturer Part Number=SN74AHC1G00DBVR, Number of Circuits=1, Number of Inputs=2, Number of Outputs=1, Octopart=https://octopart.com/sn74ahc1g00dbvr-texas+instruments-464400, Propagation Delay=5.2ns, RoHS=TRUE, Standoff Height=0mm, Temperature Range High=+125°C, Temperature Range Low=-40°C
U11: "IC REG BUCK ADJ 2A TSOT23-6", Case/Package=SOT-23-6, Max Input Voltage=28V, Max Operating Temperature=125°C, Min Input Voltage=4.5V, Min Operating Temperature=-40°C, Min Output Voltage=596mV, Output Current=2A, Quiescent Current=40uA, Switching Frequency=500kHz, Lead Free="Lead Free", Max Output Voltage=28V, Mount="Surface Mount", Number of Outputs=1, Output Configuration=Positive, Output Type=Adjustable, Packaging="Tape and Reel", RoHS Compliant=Yes, Synchronous Rectifier=Yes
U12: "Single Output Low Noise LDO, 150 mA, Fixed 5 V Output, 1.5% Tolerance, 2.2 to 16 V Input, Low IQ, 5-Pin SOT-23 (DBV), -40 to 125 degC, Green (RoHS & no Sb/Br), Tape and Reel", Manufacturer="Texas Instruments", Operating Temperature Range (degC)="-40 to 125", Accuracy (%)=1.5, ComponentLink1Description="Manufacturer URL", ComponentLink1URL=http://www.ti.com/, ComponentLink2Description=Datasheet, ComponentLink2URL=http://www.ti.com/lit/ds/symlink/lp2985-50.pdf, ComponentLink3Description="Package Specification", ComponentLink3URL=http://www.ti.com/litv/pdf/mpds018j, DatasheetVersion=SLVS522N, Fixed Output Options (V)=5, Iout (Max) (A)=0.15, Iq (Typ) (mA)=0.85, Mounting Technology="Surface Mount", Output Options="Fixed Output", PackageDescription="5-Pin Plastic Small Outline, Body 2.9 x 1.6 mm, Pitch 0.95 mm", PackageReference=DBV0005A, PackageVersion=4073253-4/L, Packing="Tape and Reel", PartNumber=LP2985-50DBVRG4, RoHS=TRUE, Vdo (Typ) (mV)=280, Vin (V)="2.2 to 16"
U13 U14: "IC GATE DRVR HALF-BRIDGE 10VSON", RoHS Compliant=Yes

## Free pads (board coordinates)
  round 6 hole 3.3 mask+0.5: 0(5,5) 0(5,62.6) 0(112,5) 0(112,62.6)

## Via types
v1: diameter 0.5/0.5/0.5/0.5 (per signal layer), hole 0.3, Top Layer to Bottom Layer, 186 vias
v2: diameter 0.6, hole 0.3, Top Layer to Bottom Layer, tented both sides, 33 vias
v3: diameter 0.45/0.45/0.45/0.45 (per signal layer), hole 0.15, Top Layer to Bottom Layer, 22 vias
v4: diameter 0.5, hole 0.2, Top Layer to Bottom Layer, 8 vias
v5: diameter 0.7, hole 0.3, Top Layer to Bottom Layer, tented both sides, 3 vias
v6: diameter 1.5, hole 0.5, Top Layer to Bottom Layer, tented both sides, 2 vias
v7: diameter 0.8, hole 0.3, Top Layer to Bottom Layer, tented both sides, 2 vias

## Nets (pads, with @x,y where several pads share a name; then routed paths per layer and width w, separated by ;. In a path a pad name is that pad's centre, name@x,y a point inside that pad or via, vN(x,y) a via of type N, cw(c..) or ccw(c..) an arc to the next point about the centre after c; other vN are vias at no path point)
5V: C7.1 C8.1 C9.1 C10.1 C11.1 C12.1 C13.1 C25.1 LDO_OUT.1 R1.1 R2.1 R3.1 U1.5 U5.5 U6.5 U7.5 U8.5 U9.5 U10.5 U12.5 | length 65.4
  Top Layer w0.3: v2(16.04,10.35) 16.624,10.35 U6.5 18.92,10.322 C8.1 ; v2@20.5,18.85 20.581,18.85 20.669,18.762 R2.1 ; v2(25,37.85) 25.038,37.812 R1.1 ; v2@27.5,13.6 27.5,13.519 27.602,13.417 U5.5 27.626,12.732 27.752,12.606 C7.1 ; C9.1@29.972,31.904 C9.1@30.104,32.036 ; C9.1 30.094,32.036 C9.1@30.104,32.036 ; v2@32.75,32.85 32.708,32.808 32.708,32.063 U1.5 C9.1@30.104,32.036 ; C10.1 C10.1@39.218,14.988 ; v2@49.75,14.85 49.831,14.85 49.933,14.952 C12.1 51.374,13.616 52.338,12.652 52.338,12.163 U9.5 ; v2@49.75,17.6 49.831,17.6 49.977,17.746 C11.1 51.308,17.812 51.308,21.302 51.562,21.556 U7.5
  Top Layer w0.35: v2@7.5,18.85 7.568,18.85 7.656,18.762 R3.1 ; C10.1 39.25,14.884 v2(39.25,13.35) ; C10.1@39.218,14.988 U10.5
  Top Layer w0.4: v2(61.25,13.35) 61.262,13.362 C13.1 62.992,15.968 63.246,16.222 U8.5
  Top Layer w0.5: U12.5 25.475,49.375 25.793,49.057 25.793,47.857 C25.1 ; C12.1 C11.1
  Top Layer w0.6: 18,50.6 v2(18,53.8)
  Bottom Layer w0.6: v2(18,53.8) 18,55.2 22,59.2 30,59.2 31.06,60.26 LDO_OUT.1
  other v2: 27.602,13.6 49.75,14.952 49.75,17.746 7.5,18.762 20.5,18.762 32.708,32.85 13,46.85 15.5,46.85 18,46.85 20.5,46.85 14.25,48.35 16.75,48.35 19.5,48.35 13,50.1 15.5,50.1 18,50.1 20.5,50.1
12V: C27.1 C28.1 C29.1 C30.1 C31.1 C32.1 C33.2 C35.2 C39.1 C40.1 Q1.2 Q2.2 U13.1 U13.6 U14.1 U14.6 | length 60.5
  Top Layer w0.3: v2(69,15.6) v2@69.081,15.6 ; C33.2 71.249,15.397 U13.6 ; Q2.2@73.856,30.25 Q2.2 ; U13.1 75.422,18.924 75.598,19.1 ; C35.2 84.711,15.397 U14.6 ; U14.1 88.884,18.984 89,19.1
  Top Layer w0.4: v2(69,15.6) 69.261,15.78 C33.2 ; v2(82.5,15.6) 82.554,15.6 82.734,15.78 C35.2
  Top Layer w0.6: Q2.2 Q2.2@73.956,30.15 ; 75.598,19.1 77,19.1 ; v7(77,20.1) 77,19.1 ; C31.1 77.978,18.622 77.5,19.1 77,19.1 ; Q1.2 Q1.2@87.418,30.15 ; 89,19.1 90.5,19.1 ; v7(90.5,20.1) 90.5,19.1 ; C32.1 91.42,17.7 91.42,18.829 91.149,19.1 90.5,19.1
  Top Layer w0.8: Q2.2@73.956,30.15 C39.1 ; Q1.2@87.418,30.15 C40.1
  Top Layer w1: C29.1 C30.1 Q2.2@73.856,30.25
  Top Layer w1.5: v6(98.5,35.6) C28.1 ; v6(99,22.1) C27.1
audio_in: C3.2 MIX.1 R6.2 R14.1 U1.1 | length 21.9
  Top Layer w0.3: U1.1 34.882,31.292 34.544,30.954 34.544,29.696 34.532,29.684 34.532,28.426 34.732,28.226 C3.2 ; MIX.1 38.86,26.14 37.958,27.042 C3.2 ; R14.1 36.576,20.032 34.732,21.876 C3.2
buck_out: BUCK_OUT.1 C21.1 C22.1 C23.1 L1.2 R16.1 U12.1 U12.3 | length 57.4
  Top Layer w0.5: U12.1 30.65,50.4 30.75,50.5 30.75,52.007 30.457,52.3 U12.3
  Top Layer w0.7: C23.1 C22.1
  Top Layer w0.8: C22.1 C21.1 ; v2(41,55.6) C21.1 ; R16.1@47.5,62.85 45,62.85 44.5,62.35 L1.2 44.45,50.3 C21.1
  Bottom Layer w0.8: BUCK_OUT.1 39.6,65 41,63.6 v2(41,55.6)
buff_in1: C16.1 D1.2 R11.2 U8.1 | length 13.7
  Top Layer w0.3: R11.2@55.736,22.3 C16.1@57.998,22.3 ; D1.2 57.774,24.858 57.723,24.806 57.723,23.845 58.166,23.402 C16.1 60.022,22.252 60.198,22.076 60.198,17.746 61.072,16.872 U8.1
buff_in2: C17.1 D2.2 R13.2 U8.3 | length 13.7
  Top Layer w0.3: R13.2 58.1,10.126 C17.1 ; D2.2 57.891,8.581 58.166,8.856 C17.1 ; U8.3 61.072,15.572 60.198,14.698 60.198,10.368 60.022,10.192 C17.1
DEAD_N: DN.1 U8.6 U13.7 U14.8 | length 41.1
  Top Layer w0.3: U8.6 66.66,16.872 67.564,15.968 67.564,14.444 68.326,13.682 68.58,13.682 ; v2(68.58,11.65) 74.676,11.65 74.826,11.65 74.826,12.306 75.634,12.306 75.634,11.439 76.442,11.439 76.442,12.296 77.25,12.296 77.25,11.65 78.031,11.65 87.122,11.65 87.884,12.412 U14.8 ; v2(68.58,13.062) 68.58,13.682 ; U13.7 73.922,14.198 73.406,13.682 68.58,13.682
  Bottom Layer w0.3: v2(68.58,11.65) v2(68.58,13.062)
DEAD_P: DP.1 U8.4 U13.8 U14.7 | length 41.4
  Top Layer w0.3: U8.4 65.42,15.572 66.04,14.952 66.04,13.174 66.802,12.412 ; U13.8 74.422,12.92 73.914,12.412 66.802,12.412 ; v2(85.344,10.38) 68.834,10.38 66.802,12.412 ; v2(85.344,12.666) 86.614,12.666 87.384,13.436 U14.7 U14.7@87.376,15.389
  Bottom Layer w0.3: v2(85.344,10.38) v2(85.344,12.666)
GND: C4.2 C5.2 C6.2 C7.2 C8.2 C9.2 C10.2 C11.2 C12.2 C13.2 C15.2 C16.2 C17.2 C19.2 C20.2 C21.2 C22.2 C23.2 C24.2 C25.2 C27.2 C28.2 C29.2 C30.2 C31.2 C32.2 C33.1 C35.1 C36.2 C38.1 C39.2 C40.2 GND1.1 GND2.1 GND3.1 GND4.1 GND6.1 GND7.1 GND8.1 GND9.1 GND10.1 INPUT.1 INPUT.4 POWER.2 Q3.3 Q4.3 R17.2 R18.2 U1.2 U2.2 U2.3 U3.2 U3.3 U4.2 U4.3 U5.2 U6.2 U7.2 U8.2 U9.3 U10.2 U11.1 U12.2 U13.9 U13.11 U14.9 U14.11 | length 15.2
  Top Layer w0.2: U13.11 74.422,16.537 74.922,16.037 U13.9 ; U14.11 87.884,16.537 88.384,16.037 U14.9
  Top Layer w0.3: U6.2 v2(16.002,13.35)
  Top Layer w0.8: C39.2 77.15,32.05 77.35,32.25 77.35,33.131 77.819,33.6 79.489,33.6 80.357,32.732 Q4.3 ; C40.2 90.65,32.05 90.85,32.25 90.85,33.131 91.319,33.6 92.951,33.6 93.819,32.732 Q3.3
  Bottom Layer w0.8: Q4.3@80.215,32.732 Q4.3 ; Q3.3@93.677,32.732 Q3.3
  other v1: 11.949,3.563 24,3.563 30,3.563 39.5,3.563 42.2,3.563 46.8,3.563 54,3.563 66.949,3.563 71.949,3.563 76.949,3.563 91.949,3.563 101.949,3.563 106.949,3.563 56.949,6 61.949,6 9.449,8.563 34.449,8.563 39.449,8.563 44.449,8.563 49.449,8.563 65,8.563 69.449,8.563 75,8.563 79.449,8.563 84.449,8.563 89.449,8.563 94.449,8.563 99.449,8.563 104.449,8.563 109.449,8.563 114.449,8.563 60,9 11,13.563 36.949,13.563 43,13.563 96.949,13.563 101.949,13.563 106.949,13.563 111.949,13.563 19,16 4.449,18.563 34.449,18.563 45,18.563 64.449,18.563 99.449,18.563 104.449,18.563 109.449,18.563 114.449,18.563 55,19 79,22 81.949,22 91.949,22 19.5,23 1.949,23.563 6.949,23.563 36.949,23.563 46.949,23.563 51.949,23.563 61.949,23.563 66.949,23.563 96.949,23.563 106.949,23.563 11.949,24 16.949,24 26.949,24 31.949,24 3,26 9.449,27 14.449,28.563 19.449,28.563 24.449,28.563 29.449,28.563 44.449,28.563 54.449,28.563 59.449,28.563 64.449,28.563 69.449,28.563 84.449,28.563 99.449,28.563 104.449,28.563 109.449,28.563 114.449,28.563 39.449,30 1.949,33.563 16.949,33.563 41.949,33.563 46.949,33.563 51.949,33.563 56.949,33.563 61.949,33.563 66.949,33.563 96.949,33.563 101.949,33.563 106.949,33.563 111.949,33.563 7.5,34 10,35 36.949,35 4.449,38.563 15,38.563 19.449,38.563 39.449,38.563 44.449,38.563 54.449,38.563 59.449,38.563 64.449,38.563 69.449,38.563 99.449,38.563 104.449,38.563 109.449,38.563 114.449,38.563 9.449,40 26.949,43.563 31.949,43.563 36.949,43.563 41.949,43.563 46.949,43.563 51.949,43.563 56.949,43.563 61.949,43.563 66.949,43.563 98,43.563 101.949,43.563 106.949,43.563 111,43.563 74.449,46 79.449,46 89.449,46 94,46 4.449,48.563 9.449,48.563 34.449,48.563 44.449,48.563 49.449,48.563 54.449,48.563 59.449,48.563 64.449,48.563 69.449,48.563 84.449,48.563 99.449,48.563 104.449,48.563 109.449,48.563 114.449,48.563 96.949,52 21.949,53 1.949,53.563 6.949,53.563 11.949,53.563 31.949,53.563 36.949,53.563 43,53.563 46.949,53.563 51.949,53.563 56.949,53.563 61.949,53.563 66.949,53.563 71.949,53.563 81.949,53.563 101.949,53.563 106.949,53.563 111.949,53.563 24.449,57 29.449,57 4.449,58.563 9.449,58.563 14.449,58.563 34.449,58.563 39.449,58.563 56.5,58.563 59.449,58.563 64.449,58.563 99.449,58.563 104.449,58.563 109.449,58.563 114.449,58.563 22,60 11.949,63.563 16.949,63.563 21.949,63.563 36.949,63.563 41.949,63.563 61.949,63.563 66.949,63.563 73,63.563 101.949,63.563 106.949,63.563
  other v4: 74.422,16.222 87.884,16.222 73.472,16.797 75.372,16.797 86.934,16.797 88.834,16.797 74.422,17.372 87.884,17.372
Hside_1: Q2.1 U13.4 | length 19.4
  Top Layer w0.3: U13.4@73.914,18.347 73.914,22.572
  Top Layer w1: 73.914,22.572 73.914,22.836 73.914,23.336 70.966,23.336 70.966,24.59 76.019,24.59 76.019,25.844 73.914,25.844 73.914,27.552 Q2.1
Hside_2: Q1.1 U14.4 | length 19.9
  Top Layer w0.3: U14.4@87.376,18.347 87.376,22.572
  Top Layer w1: 87.376,22.572 87.376,22.9 87.376,23.4 84.328,23.4 84.328,24.654 89.65,24.654 89.65,25.908 87.376,25.908 Q1.1
Lside_1: Q4.1 U13.10 | length 20.5
  Top Layer w0.3: 75.422,13.952 U13.10 ; 80.518,13.882 80.518,14.19
  Top Layer w0.5: 75.422,13.952 75.946,13.428
  Top Layer w0.7: 75.946,13.428 79.828,13.428 80.282,13.882
  Top Layer w1: 80.518,14.19 Q4.1
Lside_2: Q3.1 U14.10 | length 21.4
  Top Layer w0.3: U14.10 88.9,15.381 88.9,13.682 ; 94.234,13.682 94.234,13.936
  Top Layer w0.5: 88.9,13.682 89.482,13.1
  Top Layer w0.7: 89.482,13.1 93.144,13.1 93.98,13.936
  Top Layer w1: 93.98,13.936 Q3.1
NetA_L_1: A_L.1 C2.1 INPUT.2 | length 10.8
  Top Layer w0.3: INPUT.2 20.26,31 C2.1 20.306,28.294 21.6,27 A_L.1
NetA_R_1: A_R.1 C1.1 INPUT.3 | length 11.9
  Top Layer w0.3: INPUT.3@12.722,34.804 17.994,34.804 18.798,34 20.304,34 C1.1
  Top Layer w0.4: INPUT.3@12.722,34.804 12.8,34.882 A_R.1
NetC1_2: C1.2 R4.1 | length 2.8
  Top Layer w0.3: C1.2 R4.1
NetC2_2: C2.2 R5.1 | length 2.8
  Top Layer w0.3: C2.2 R5.1
NetC3_1: C3.1 R4.2 R5.2 R6.1 U1.4 | length 19.2
  Top Layer w0.3: U1.4 27.74,33.936 27.674,34.002 27.674,30.954 27.674,28.172 28.804,27.042 C3.1 32.832,28.226 33.02,28.414 33.02,29.672 R6.1@33.032,29.684
NetC14_1: C14.1 R10.2 U5.4 | length 5
  Top Layer w0.3: C14.1 25.146,14.578 25.2,14.632 U5.4
NetC15_1: C15.1 R9.2 R10.1 | length 4.2
  Top Layer w0.3: C15.1 22.098,14.686 22.086,14.698 R10.1@23.634,14.698
NetC18_1: C18.1 U11.6 | length 2.6
  Top Layer w0.6: U11.6 49.15,56 C18.1
NetC18_2: C18.2 L1.1 U11.2 | length 12.9
  Top Layer w0.4: C18.2 53,55.85 53.5,56.35 53.5,58.85 53,59.35 U11.2
  Top Layer w0.5: L1.1 51.2,50.55 C18.2
NetC24_1: C24.1 U12.4 | length 2.4
  Top Layer w0.5: U12.4 25.475,53.075 25.75,53.35 25.75,54.55 C24.1
NetC26_1: C26.1 U13.3 | length 2.8
  Top Layer w0.3: U13.3 74.422,19.016 74.93,19.524 74.93,20.728 C26.1
NetC26_2: C26.2 U13.5 | length 2.8
  Top Layer w0.3: C26.2 72.898,20.728 72.898,19.524 73.422,19 U13.5
NetC34_1: C34.1 U14.3 | length 2.8
  Top Layer w0.3: U14.3 87.884,18.762 88.392,19.27 88.392,20.728 C34.1
NetC34_2: C34.2 U14.5 | length 2.8
  Top Layer w0.3: C34.2 86.36,20.728 86.36,19.27 86.884,18.746 U14.5
NetC36_1: C36.1 C37.1 L2.2 OUT_P.1 OUTPUT.2 | length 19.2
  Top Layer w0.8: OUT_P.1 71,61.6 71.6,61 76,61
  Top Layer w1: C36.1 C37.1
NetC37_2: C37.2 C38.2 L3.2 OUT_N.1 OUTPUT.1 | length 19.2
  Top Layer w0.8: 91.4,61 95.781,61 96.25,61.469 OUT_N.1
  Top Layer w1: C37.2 C38.2
NetD1_1: D1.1 R11.1 U7.6 | length 5.7
  Top Layer w0.3: U7.6 54.406,22.206 R11.1 54.518,24.258 55.118,24.858 D1.1
NetD2_1: D2.1 R13.1 U9.4 | length 6
  Top Layer w0.3: U9.4@52.154,10.192 54.452,10.192 R13.1 54.518,8.186 55.118,7.586 D2.1
NetR7_1: R7.1 R8.2 U6.3 | length 5.1
  Top Layer w0.3: R8.2@13.208,12.146 15.317,12.146 15.352,12.111 U6.3 15.352,14.598 R7.1@15.252,14.698
NetR12_1: R12.1 R14.2 U10.3 | length 4.7
  Top Layer w0.3: R14.2 40.64,20.032 40.858,19.814 U10.3 43.391,18.389 R12.1
NetR15_2: R15.2 R17.1 U11.5 | length 4.4
  Top Layer w0.5: R15.2@46.25,59.35 U11.5
  Top Layer w0.6: R17.1@46.25,57.85 R15.2@46.25,59.35
NetR16_2: R16.2 R18.1 U11.4 | length 4.4
  Top Layer w0.4: R16.2@49,62.85 49,60.38 49.08,60.3 U11.4
  Top Layer w0.5: R16.2@49,62.85 R18.1@50.75,62.85
PWM_out: PWM.1 R12.2 U7.1 U9.1 U9.2 U10.1 | length 21.9
  Top Layer w0.3: U10.1 43.377,17.089 R12.2 PWM.1 PWM.1@47.5,17.196 ; U9.1 48.508,12.092 47.5,13.1 PWM.1@47.5,17.196 ; U7.1 48.606,22.206 47.5,21.1 PWM.1@47.5,17.196
  Top Layer w0.4: U9.2@49.954,11.142 U9.1@49.954,12.092
schmitt_out: R7.2 R9.1 U6.1 | length 6.6
  Top Layer w0.3: U6.1 16.652,14.598 16.752,14.698 R9.1@20.586,14.698
triangle: C14.2 R8.1 RAMP.1 U5.1 U10.4 | length 43.9
  Top Layer w0.3: R8.1@13.208,10.646 13.208,8.689 14.106,7.791 25.322,7.791 ; C14.2 25.146,7.967 25.322,7.791 ; U5.1 29.958,12.732 U5.1@30.269,12.732 ; U5.1@29.958,12.596 29.958,12.172 29.973,12.157 30.073,12.057 31.828,12.057 32.004,11.881 32.004,8.807 30.988,7.791 25.322,7.791 ; U5.1@30.405,12.596 U5.1@30.269,12.732 ; U10.4 36.457,18.389 34.798,16.73 34.798,12.92 34.61,12.732 30.405,12.732 U5.1@30.269,12.732
Vout+: L2.1 Q2.3 Q4.2
  other v3: 76.134,35.586 76.584,35.586 77.034,35.586 77.484,35.586 76.359,36.036 76.809,36.036 77.259,36.036 76.134,36.486 76.584,36.486 77.034,36.486 77.484,36.486
Vout-: L3.1 Q1.3 Q3.2
  other v3: 89.634,35.586 90.084,35.586 90.534,35.586 90.984,35.586 89.859,36.036 90.309,36.036 90.759,36.036 89.634,36.486 90.084,36.486 90.534,36.486 90.984,36.486
Vref1_2V5: C4.1 R1.2 U1.3 U2.1 Vref1.1 | length 40.1
  Top Layer w0.4: v2@27.8,40.8 27.778,40.778 R1.2 27.844,37.878 U2.1 C4.1 34.882,37.794 U1.3
  Bottom Layer w0.4: Vref1.1@2.4,42.6 9.2,42.6 25.978,42.6 v2(27.778,40.8)
Vref2_2V5: C5.1 R2.2 U3.1 U5.3 Vref2.1 | length 39.1
  Top Layer w0.4: v2(23.2,21.6) 23.206,21.594 R2.2 23.272,18.828 U3.1 C5.1 29.802,18.744 U5.3
  Bottom Layer w0.4: Vref2.1 2.374,13.8 9.2,13.8 12.6,17.2 18.166,17.2 18.4,17.434 18.4,19.8 20.2,21.6 v2(23.2,21.6)
Vref3_2V5: C6.1 R3.2 U4.1 U6.4 Vref3.1 | length 31.4
  Top Layer w0.3: R3.2 10.064,18.828 U4.1 ; v5(14.478,9.11) 14.478,9.872 14.89,10.284 15.317,10.284 15.317,10.287 U6.4 ; v5(14.478,16.222) 14.38,16.222 13.854,16.748 U4.1 ; C6.1 U4.1
  Bottom Layer w0.3: v5(14.478,9.11) v5(14.478,16.222)
  Bottom Layer w0.4: Vref3.1 9,11.2 11.09,9.11 v5(14.478,9.11)
pads on no net: 12V.1 C19.1 C20.1 INPUT.6 INPUT.7 POWER.1 R15.1 U7.3 U7.4 U11.3 U13.2 U14.2
copper on no net: | length 10.3
  Top Layer w0.6: 46.25,60.85 v2(47.75,60.85) ; 51.35,60.3 52.45,60.3 52.806,60.656 54.676,60.656 59.944,60.656 v5@60,60.6
  other v5: 60,60.656

## Polygon pours and split planes (outlines as drawn)
5V on Mid2- POWER "PWR_5VB" (solid, pour order 9): 0.5,45.1 0.5,67.1 35.5,67.1 35.5,44.6 0.5,44.6 0.5,45.086 0.514,45.1
12V on Mid2- POWER "PWR_12VB" (solid, pour order 8): 36,45.6 36,67.1 67.5,67.1 67.5,45.6
12V on Mid2- POWER "PWR_12V" (solid, pour order 3): 67,0.6 117.094,0.6 117.094,67.1 67,67.1
5V on Mid2- POWER "PWR_5V" (solid, pour order 2): 0.5,0.6 66.5,0.6 66.5,45.1 0.5,45.1
GND on Mid1- GND "GND" (solid, pour order 1): 0.273,0.6 116.5,0.6 116.5,66.85 116.25,67.1 0.5,67.1
GND on Top Layer "GND_Top" (solid, remove dead copper, pour order 10): 0.6,0.6 116.4,0.6 116.4,67 0.6,67
GND on Bottom Layer "GND_Bottom" (solid, remove dead copper, pour order 11): 0.6,0.6 116.4,0.6 116.4,67 0.6,67

## Keep-outs
Keep-Out Layer:
  the board outline again, w1.2

## Other copper
Top Layer:
  pour cut-out: 91.8,31.6 95.9,31.6 95.9,28.8 91.8,28.8
  pour cut-out: 84.5,44.9 84.5,31 89.1,31 89.1,34.4 96.5,34.4 96.5,44.9
  pour cut-out: 78.3,31.6 82.4,31.6 82.4,28.8 78.3,28.8
  pour cut-out: 70.9,44.9 70.9,31 75.6,31 75.645,31.045 75.645,34.449 84.7,34.449 84.7,44.9
  region net 5V: 25.5,48.6 25.5,47.1 25.479,47.079 22.395,47.079 22.395,45.1 20,45.1 20,51.35 22.395,51.35 22.395,48.6
  region net 5V: 11.75,45.1 20,45.1 20,51.35 11.75,51.35
  region net NetC37_2: 87.5,51.85 93.25,51.85 93.25,64.85 84,64.85 84,59.85 87.5,59.85
  region net NetC36_1: 74.25,51.6 79.75,51.6 79.75,59.85 82.75,59.85 82.75,64.85 74.25,64.85
  region net Vout-: 89.25,35.35 91.5,35.35 91.5,40.1 89.25,40.1
  region net Vout+: 78,35.35 78,40.6 75.75,40.6 75.75,35.35
Mid1- GND:
  pour cut-out: 92.166,31.76 92.166,28.66 95.666,28.66 95.666,31.76 92.066,31.76
  pour cut-out: 85.562,34.3 85.562,31.2 89.062,31.2 89.062,34.3 85.462,34.3
  pour cut-out: 78.704,31.76 78.704,28.66 82.204,28.66 82.204,31.76 78.604,31.76
  pour cut-out: 72.1,34.3 72.1,31.2 75.6,31.2 75.6,34.3
Mid2- POWER:
  pour cut-out: 92.166,31.76 92.166,28.66 95.666,28.66 95.666,31.76
  pour cut-out: 85.562,34.3 85.562,31.2 89.062,31.2 89.062,34.3
  pour cut-out: 78.704,31.76 78.704,28.66 82.204,28.66 82.204,31.76
  pour cut-out: 72.1,34.3 72.1,31.2 75.6,31.2 75.6,34.3
Bottom Layer:
  pour cut-out: 85.2,31.2 88.7,31.2 88.7,28.4 96.1,28.4 96.1,31.9 92.8,31.9 92.8,37.3 88.1,37.3 88.1,35 85.2,35 85.2,31.1
  pour cut-out: 71.7,31.2 75.2,31.2 75.2,28.4 82.6,28.4 82.6,31.9 79.3,31.9 79.3,37.3 74.6,37.3 74.6,35 71.7,35
  region net Vout-: 89.25,33.85 91.5,33.85 91.5,36.85 89.25,36.85
  region net Vout+: 75.75,33.85 78,33.85 78,36.85 75.75,36.85
  region net Vout-: 86.25,31.6 89.5,31.6 89.5,29.1 91.5,29.1 91.5,33.85 86.25,33.85
  region net Vout-: 89.5,29.1 95.25,29.1 95.25,31.35 91.5,31.35
  region net Vout+: 72.75,33.85 72.75,31.6 76,31.6 76,29.1 78,29.1 78,33.85
  region net Vout+: 76,29.1 81.75,29.1 81.75,31.35 78,31.35

## Silkscreen, mask and mechanical layers (free items; w line width, h text height)
Top Overlay:
  text "+" at 85.767,7.75 h2.5
  text "-" at 80.667,7.65 h2.5
  text "CLASS D AMPLIFIER" at 10.99,2.15 h2.5
  text "REV.1" at 55.393,2.15 h2.5
  text "12V" at 72.726,1.65 h1.5
M7 Board Outline:
  lines w0.5: -0.01,5.61 ccw(c5.621,5.631) 5.6,0 111.4,0 ccw(c111.379,5.631) 117.01,5.61 ; 0,5.61 0.001,61.99 cw(c5.631,61.969) 5.61,67.599 111.39,67.6 ; 111.39,67.61 cw(c111.369,61.979) 117,62 117,5.61

## Dimensions
111.39,67.6 to 111.4,0 on M5 Dimensions
0,5.61 to 117,5.61 on M5 Dimensions
5,62.6 to 112,62.6 on M5 Dimensions